# Altium PCB PCB1.PcbDoc (part 1 of 2)
Units mil, origin at the board's own origin, x right, y up, seen from the top; angles counter-clockwise.
Board outline 1411.86 x 1442.8 mil, 4 copper layers (Top Layer, GND, Sign, Bottom Layer), stack 74.06 mil thick; 79 components, 66 nets, 343 pads, 393 vias.
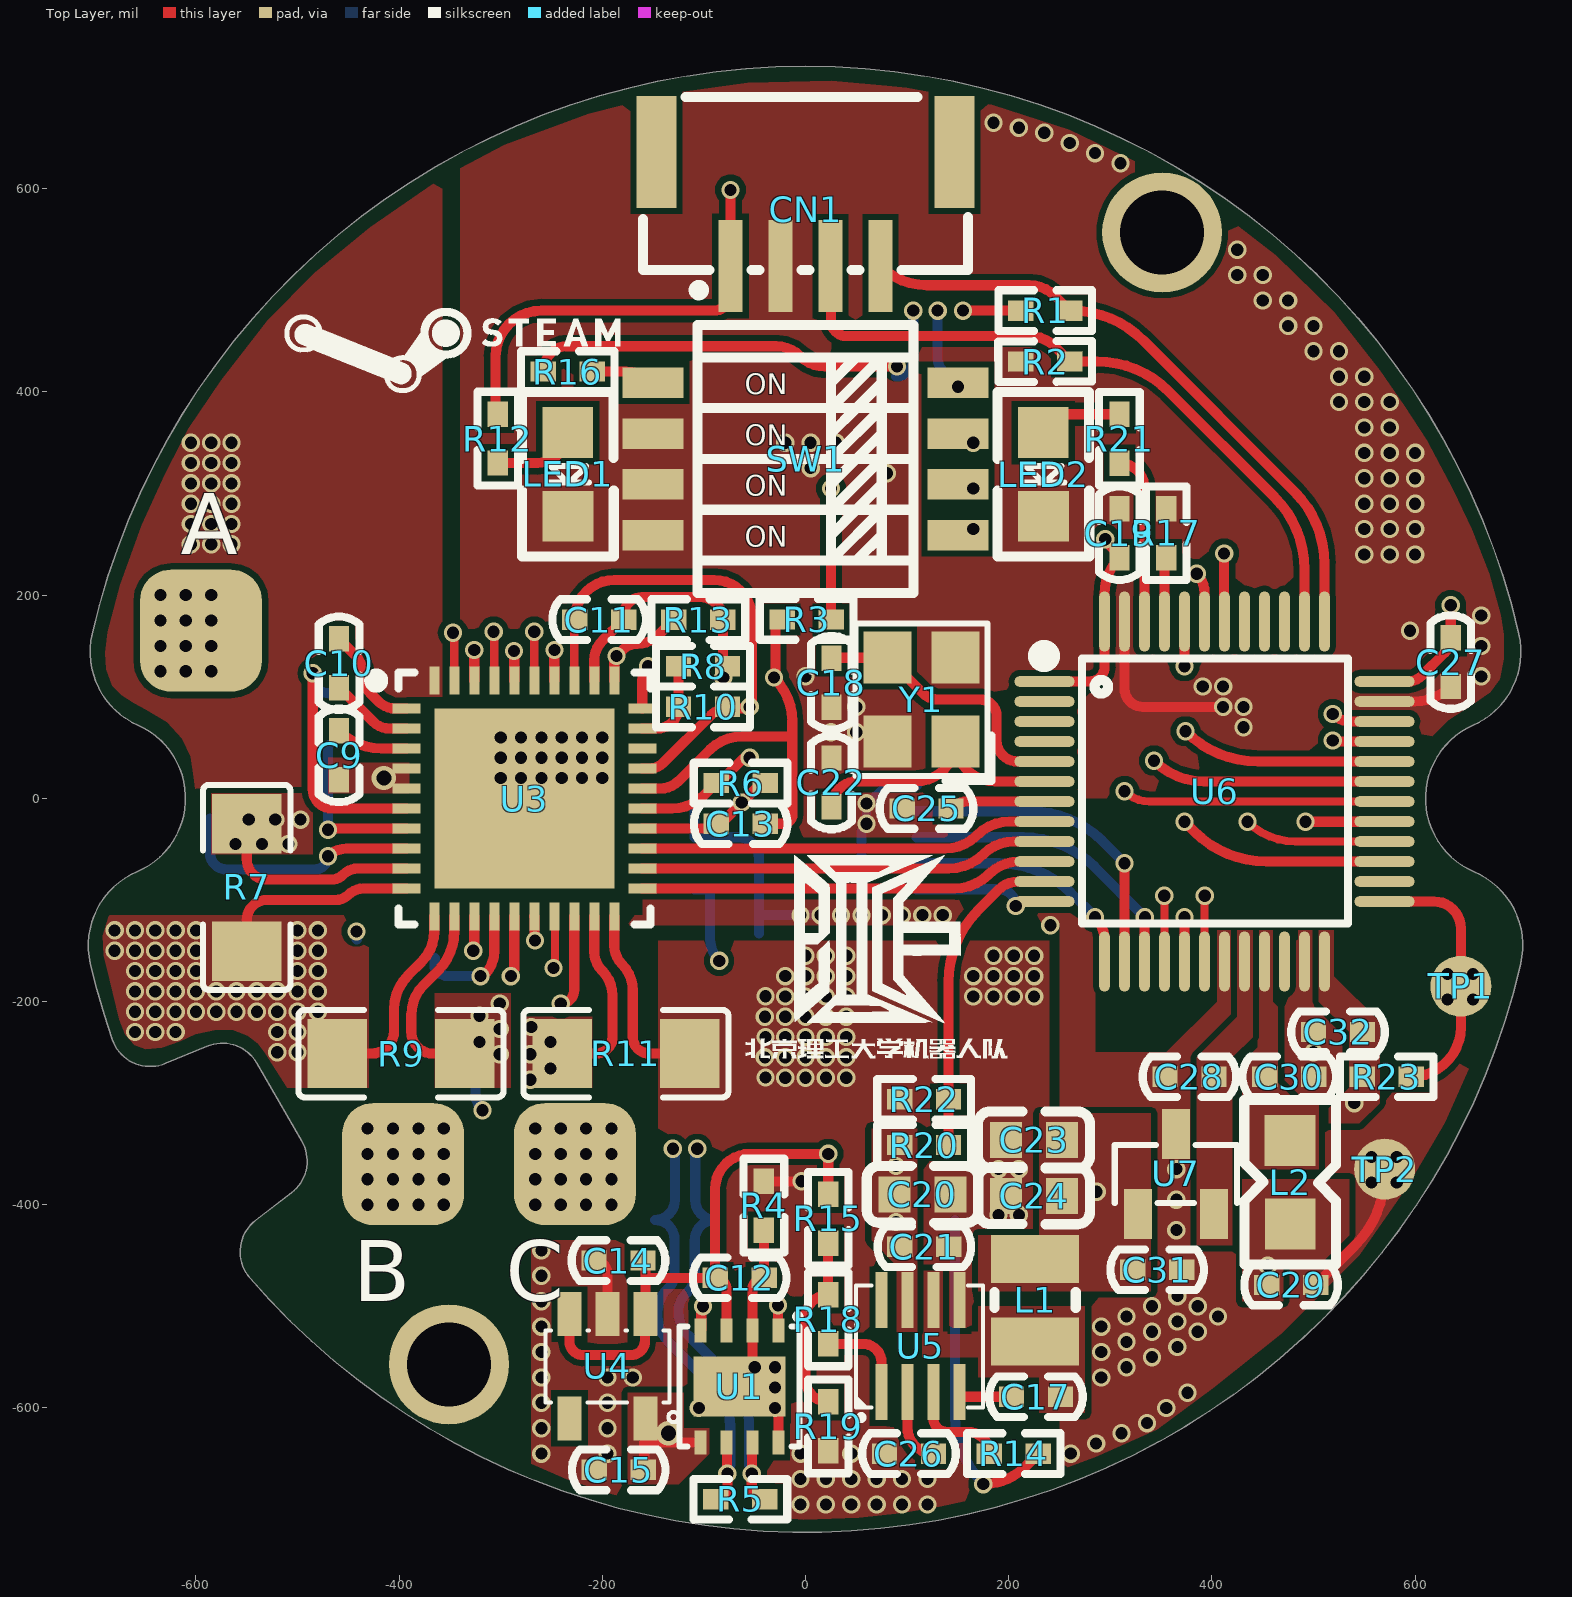
[diagram p0: Top Layer view]
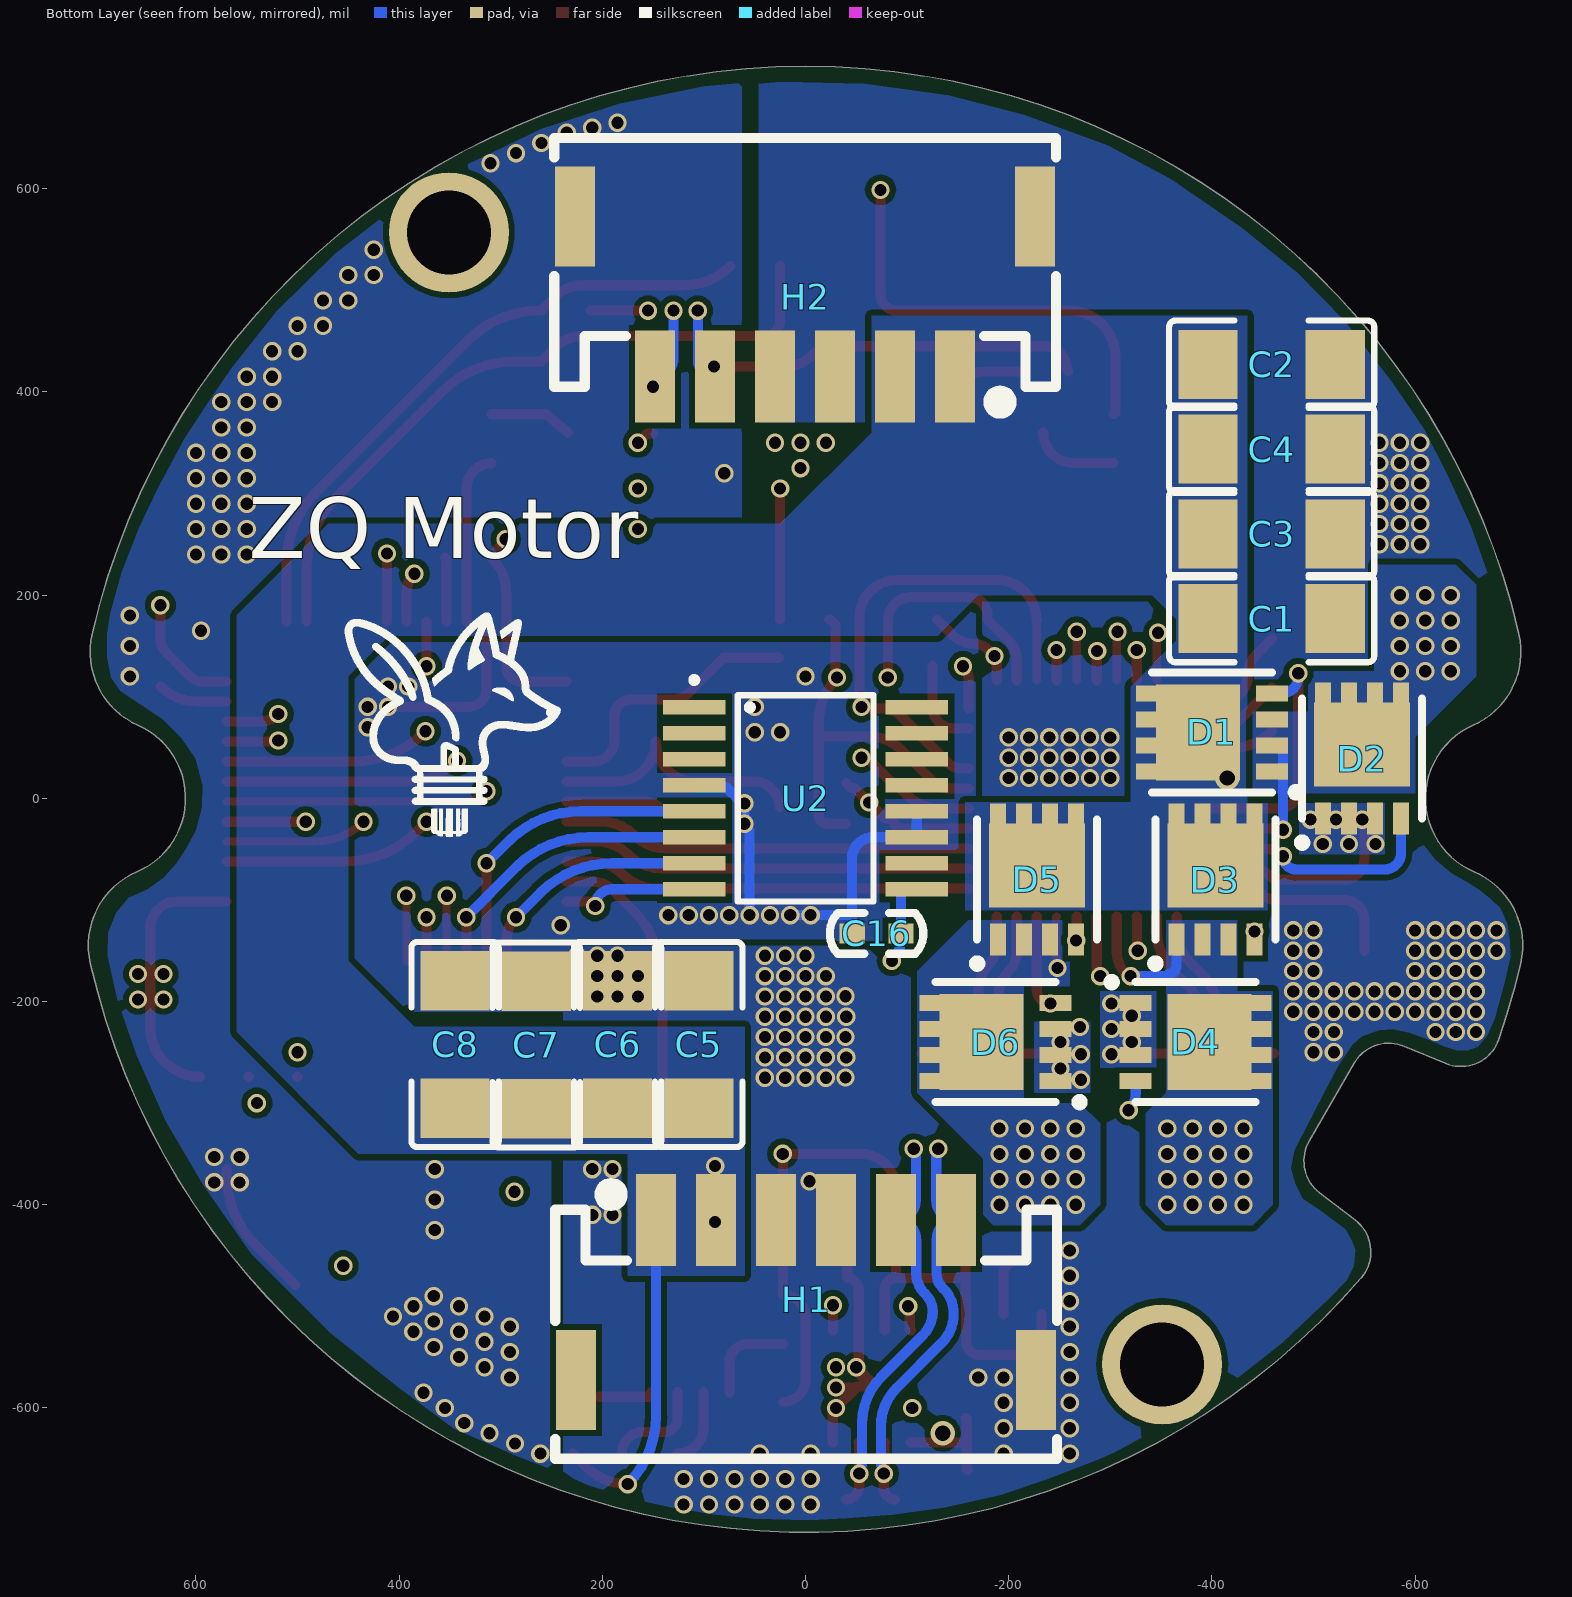
[diagram p1: Bottom Layer view, seen from below]
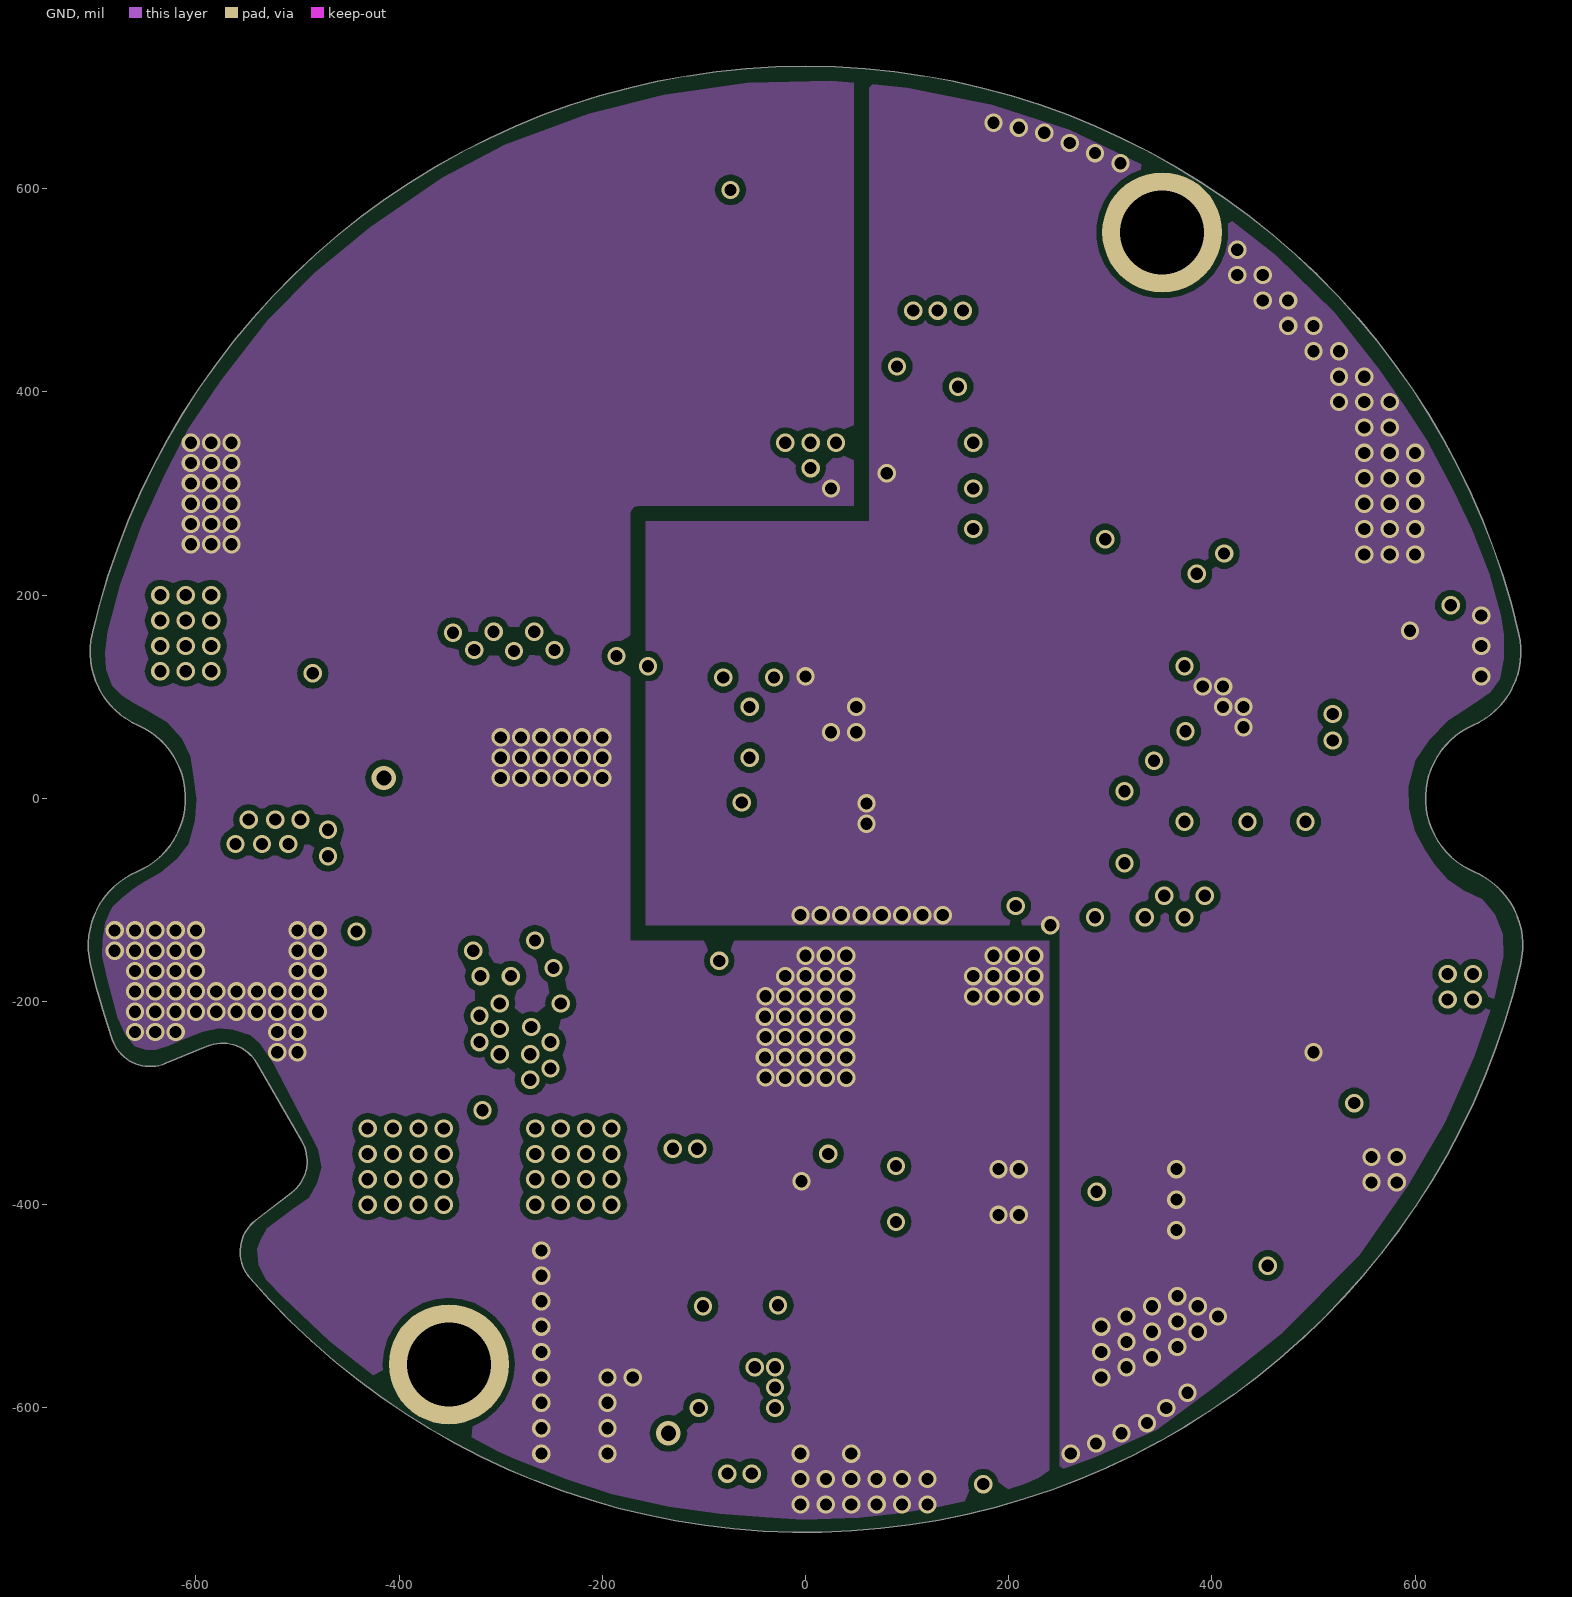
[diagram p2: GND]
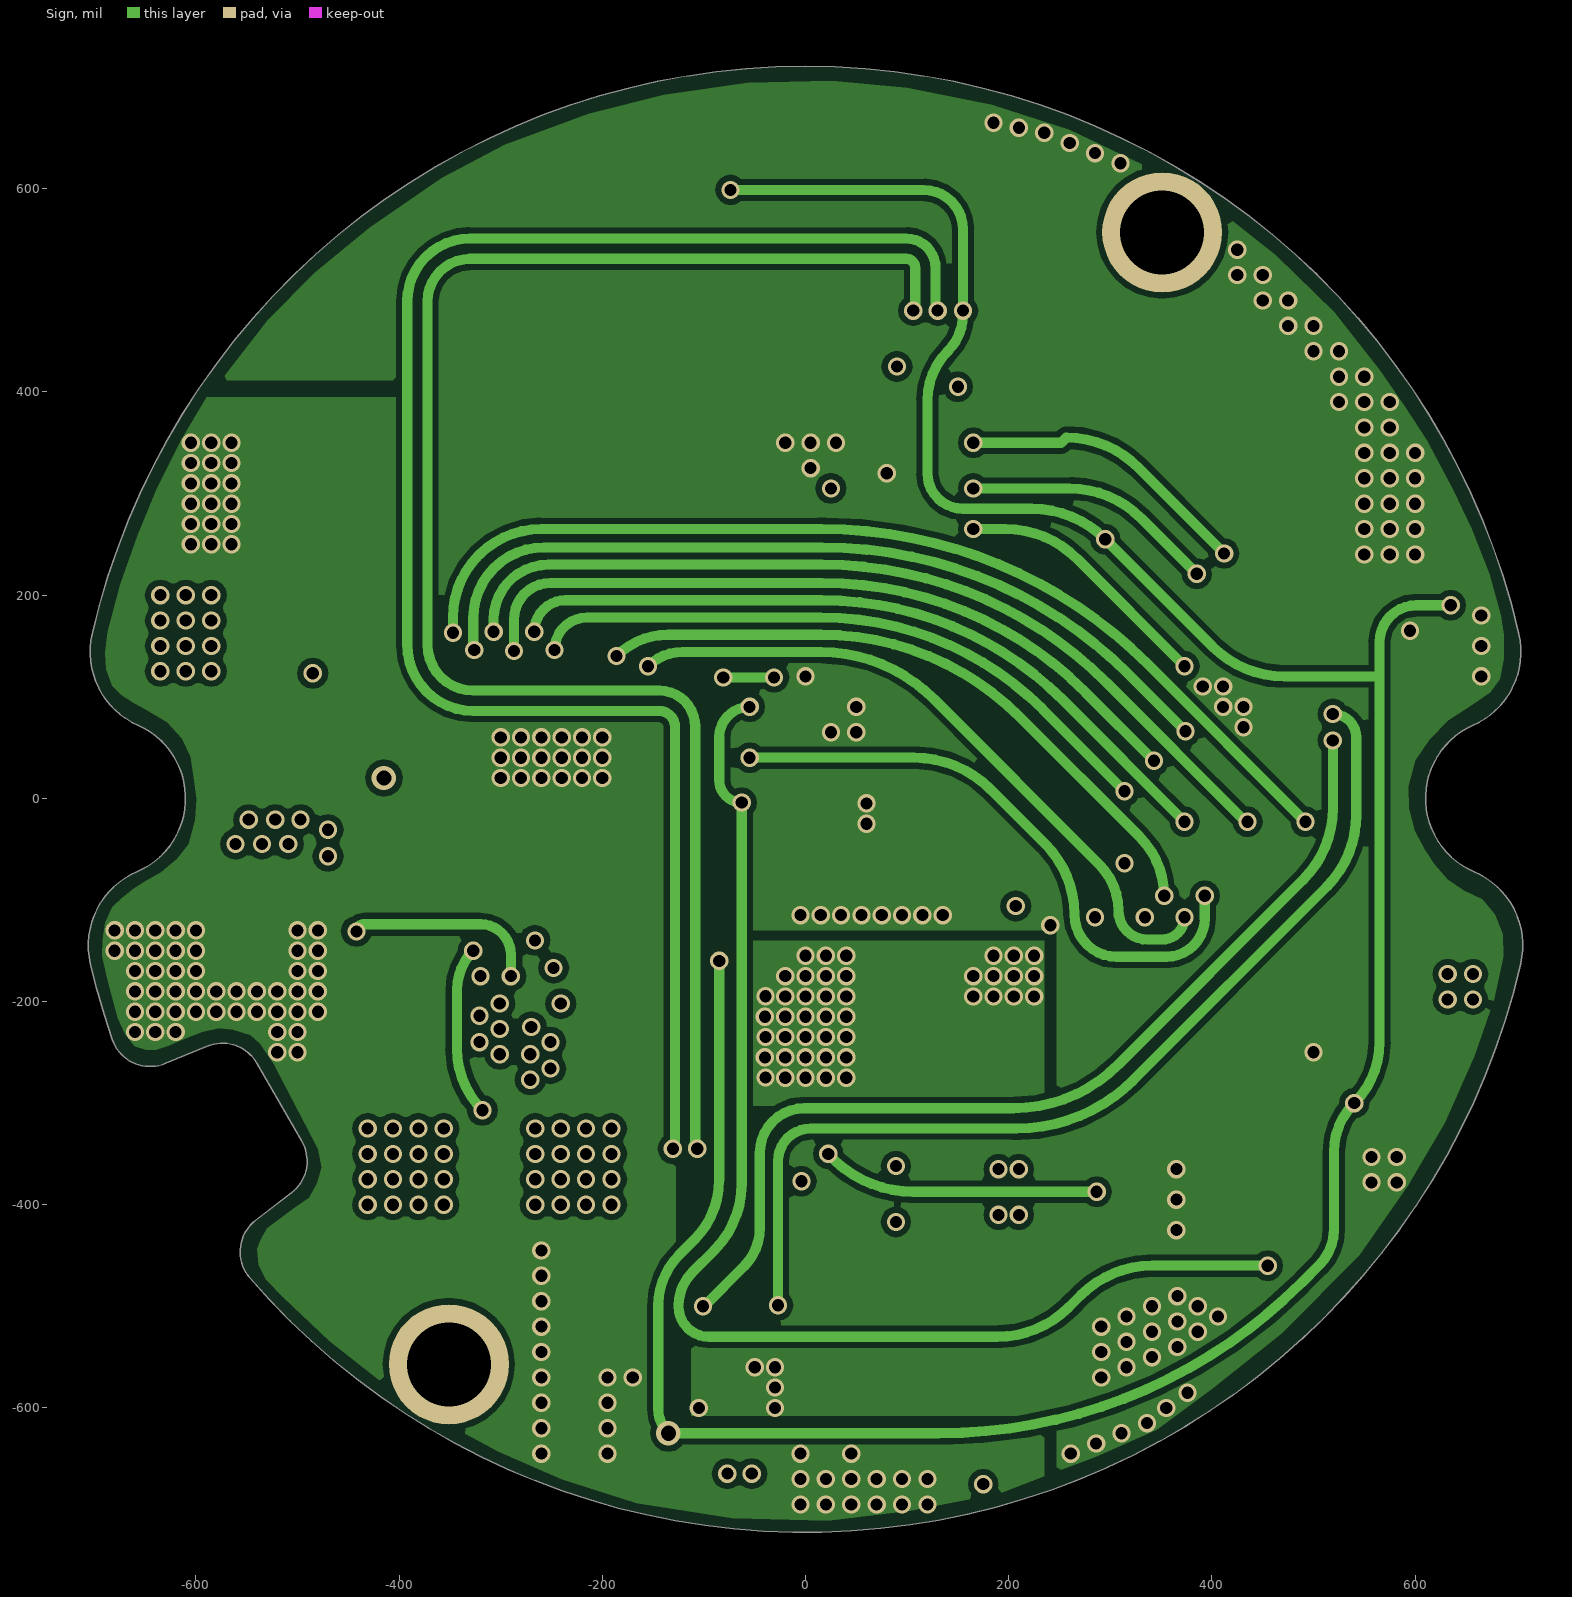
[diagram p3: Sign]
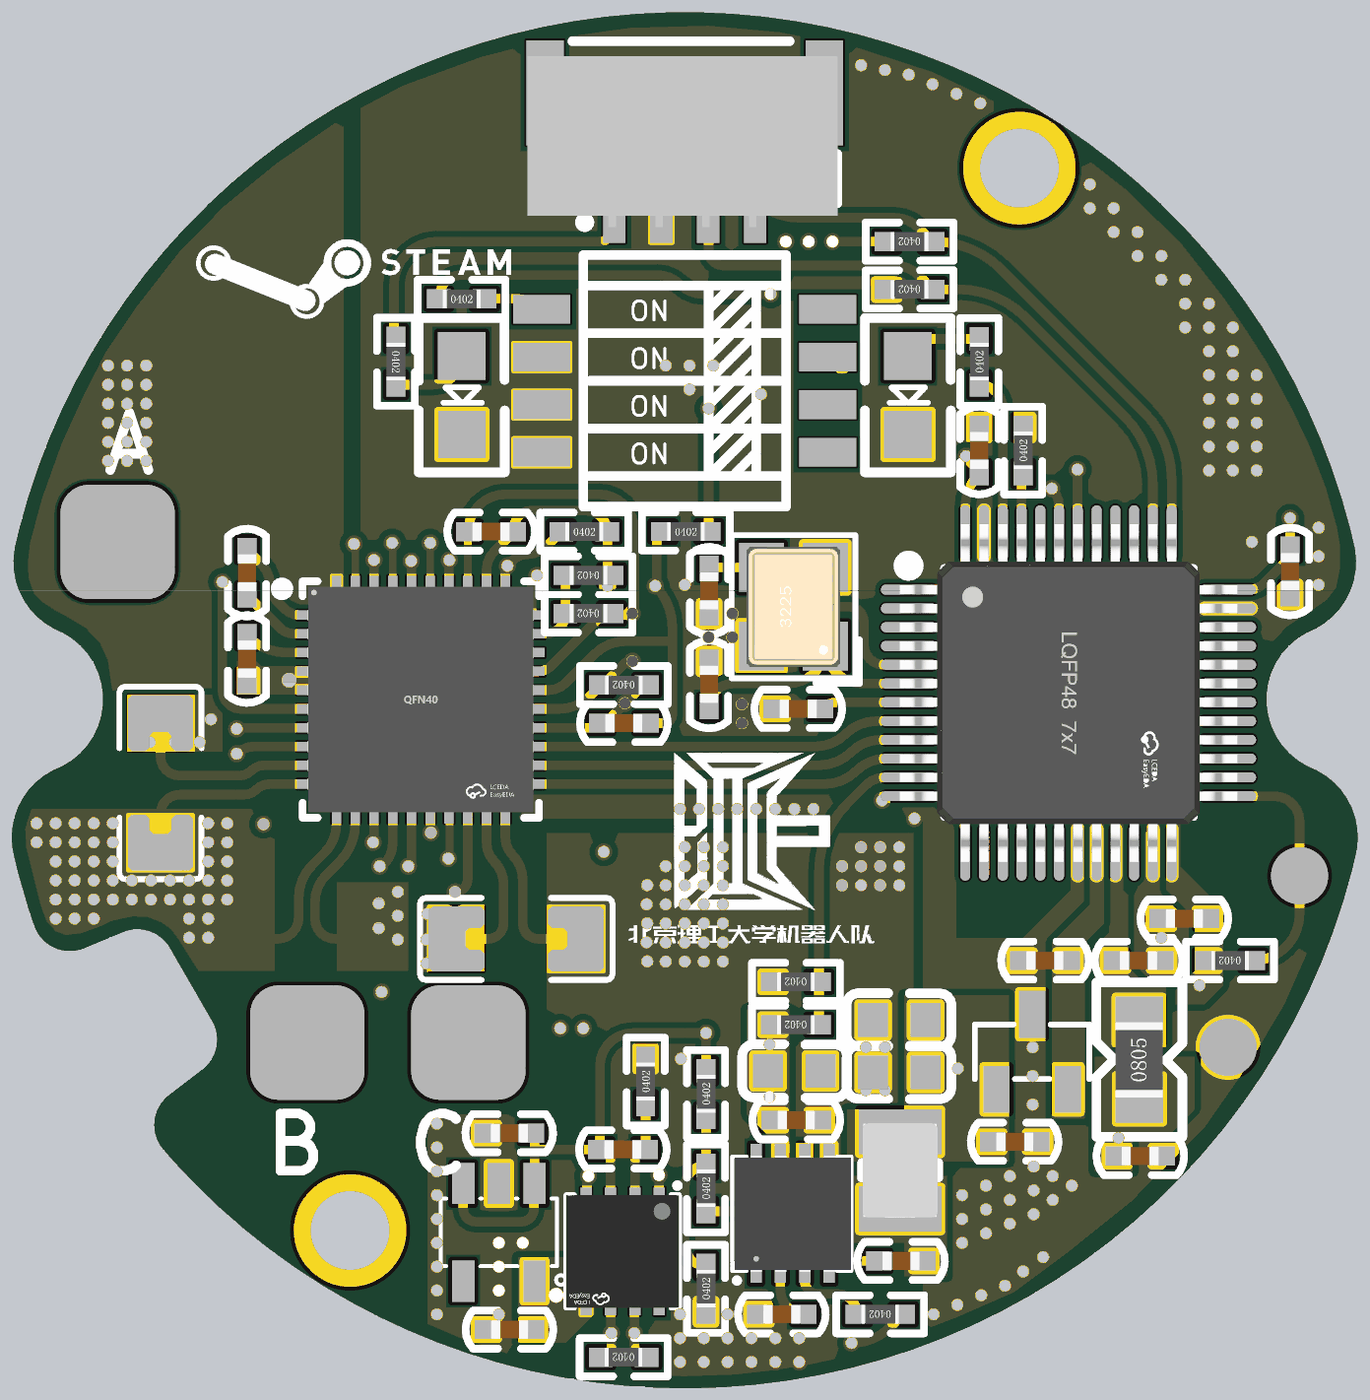
[diagram p5: 3D render of the assembled board from above, using the file's embedded part models]
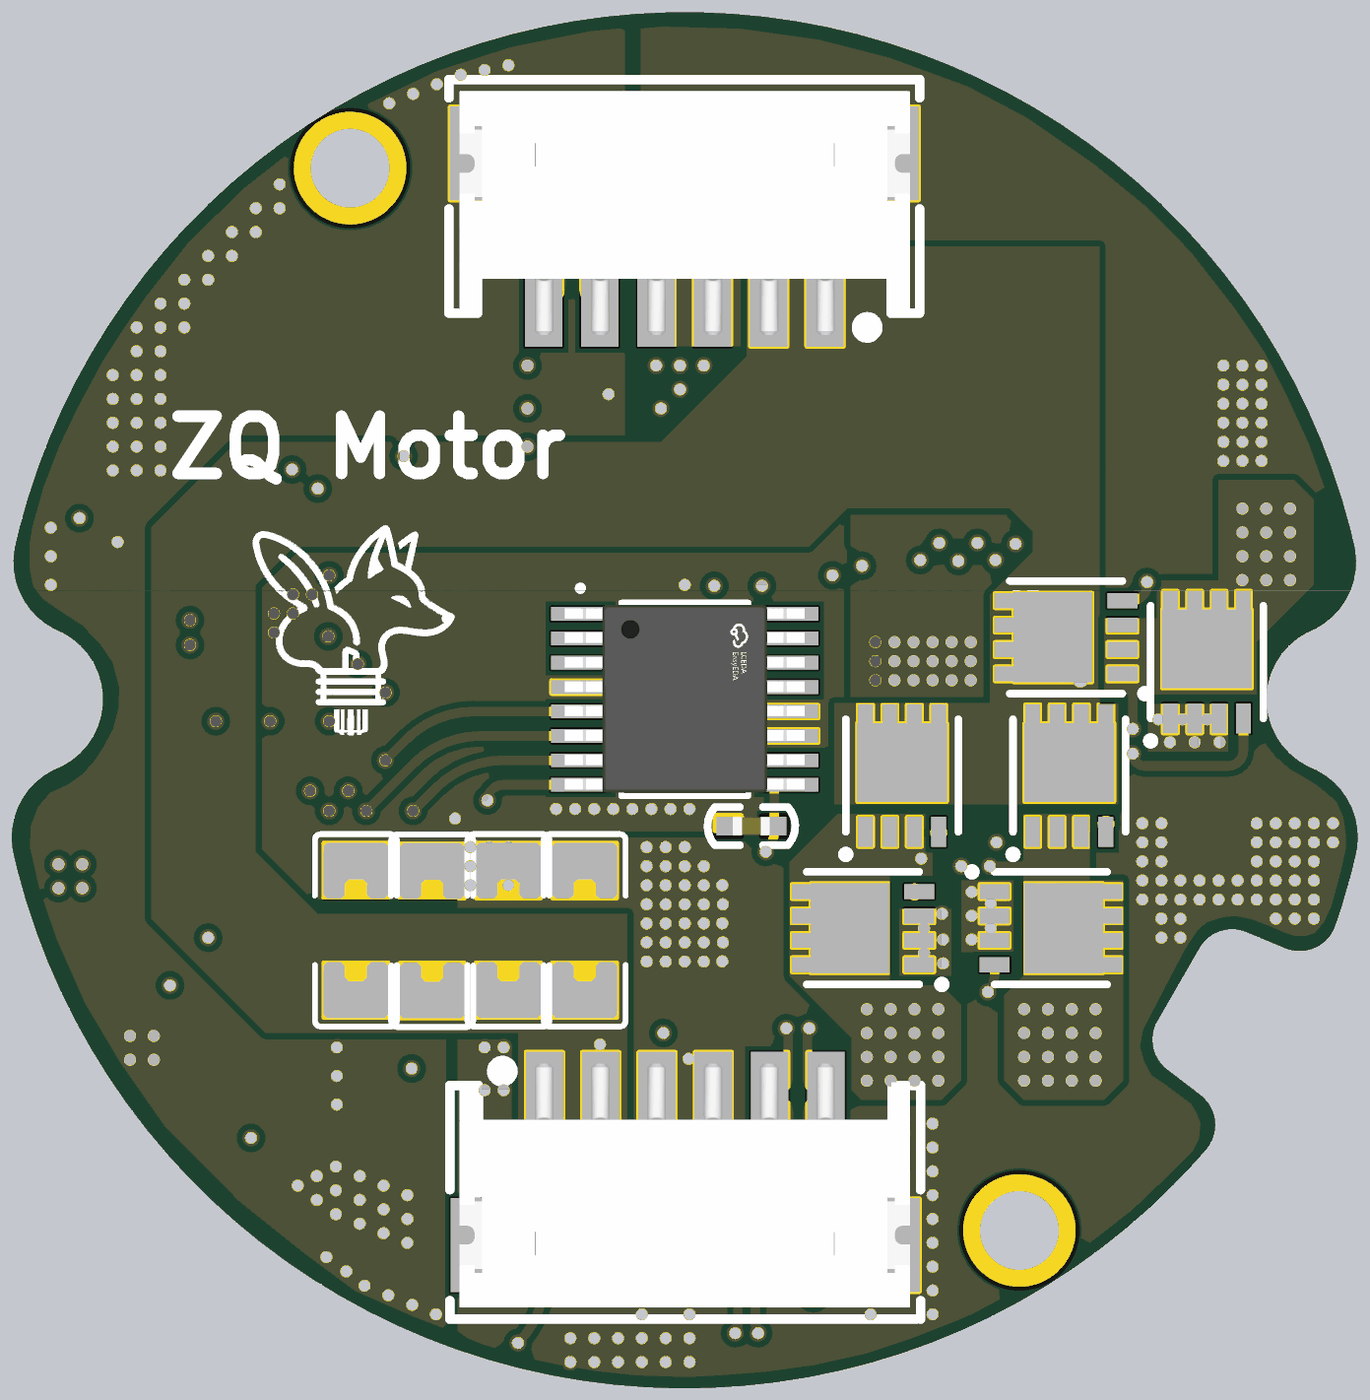
[diagram p6: 3D render of the assembled board from below, using the file's embedded part models]

## Layer stack, top to bottom
Top Solder: solder mask 0.4, Solder Resist, Dk 3.5
Top Layer: signal copper 1.4
Dielectric 2: prepreg 10.6299, PP-006, Dk 4.1
GND: signal copper 1.378
Dielectric 1: dielectric 47.244, FR-4, Dk 4.8
Sign: signal copper 1.378
Dielectric 3: prepreg 10.6299, PP-006, Dk 4.1
Bottom Layer: signal copper 1.4
Bottom Solder: solder mask 0.4, Solder Resist, Dk 3.5

## Board outline
-546.84,-472.1 cw(c-517.04,-446.38) -541.01,-415.14 -505.93,-388.23 ccw(c-529.9,-356.99) -495.81,-337.31 -540.02,-260.73 ccw(c-574.11,-280.41) -589.18,-244.04 -630.03,-260.96 cw(c-645.1,-224.58) -682.28,-237.53 cw(c0,0) -703.91,-162.57 cw(c-627.19,-144.85) -658.08,-72.43 ccw(c-688.98,0) -657.17,72.03 cw(c-625.35,144.06) -702.08,161.73 cw(c0,0) 702.08,161.73 cw(c625.35,144.06) 657.17,72.03 ccw(c688.98,0) 658.08,-72.43 cw(c627.19,-144.85) 703.91,-162.57 cw(c0,0)

## Design rules (kind name [scope] priority, off if disabled: settings)
Clearance [All] p1: gap=6 ignorepadtopadclearanceinfootprint=FALSE except(0: Arc-Hole Track-Hole SMDPad-Hole THPad-Hole Via-Hole Fill-Hole Poly-Hole Region-Hole Text-Hole)
DiffPairsRouting [All] p1: maxlimit=10 minlimit=10 mostfreqgap=10 toplayer_minwidth=8 toplayer_maxwidth=15 toplayer_prefwidth=10 midlayer1_minwidth=8 midlayer1_maxwidth=15 midlayer1_prefwidth=10 midlayer2_minwidth=8 midlayer2_maxwidth=15 midlayer2_prefwidth=10 bottomlayer_minwidth=8 bottomlayer_maxwidth=15 bottomlayer_prefwidth=10 maxuncoupledlength=500
HoleSize [All] p1: absolutevalues=TRUE maxlimit=10000 minlimit=1 maxpercent=80.000 minpercent=20.000
HoleToHoleClearance [All] p1: gap=0 allowstackedmicrovias=TRUE
MinimumSolderMaskSliver [All] p1: minsoldermaskwidth=0
PlaneClearance [All] p1: clearance=6
PlaneConnect [All] p1: planeconnectstyle=Direct reliefexpansion=20 reliefentries=4 reliefconductorwidth=10 reliefairgap=10
PolygonConnect [All] p1: connectstyle=Direct reliefconductorwidth=10 reliefentries=4 polygonreliefangle="90 Angle" airgapwidth=10
RoutingVias [All] p1: holewidth=12 width=18 viastyle="Through Hole" minholewidth=12 minwidth=18 maxholewidth=28 maxwidth=50
SilkToSilkClearance [All] p1: silktosilkclearance=0
SilkToSolderMaskClearance [IsPad] p1: minsilkscreentomaskgap=0 clearancetoexposedcopper=TRUE
SolderMaskExpansion [All] p1: expansion=4 istentingtop=FALSE
Width [All] p1: maxlimit=20 minlimit=8 preferedwidth=10
22 further rules are at their usual default settings.

## Classes and differential pairs
component class Sheet1: C1 C2 C3 C4 C6 C8 C11 C15 C16 C19 C23 C25 C31 CN1 D1 D2 D3 D4 D5 D6 H1 H2 L1 L2 LED1 LED2 R1 R2 R3 R4 R6 R8 R9 R10 R12 R13 R15 R18 R19 R23 SW1 TP1 TP2 U1 U3 U5 U7 Y1

## Components (designator, comment, footprint, x,y, rotation, side; value= is the part's Value field where it differs from the comment)
C1 "100uF" 1206 -1049.75,159.95 r0 bottom
C2 "100uF" 1206 -1049.75,410.11 r0 bottom
C3 "100uF" 1206 -1049.75,243.34 r0 bottom
C4 "100uF" 1206 -1049.75,326.73 r0 bottom
C5 "100uF" 1206 88.02,348.63 r270 bottom
C6 "100uF" 1206 168.02,348.63 r270 bottom
C7 "100uF" 1206 248.02,348.23 r270 bottom
C8 "100uF" 1206 328.02,348.63 r270 bottom
C9 "1uF" c0402 -459.14,66.35 r270 top
C10 "47nF" c0402 -459.14,156.97 r270 top
C11 "1uF" c0402 -179.05,175.88 r180 top
C12 "0.1uF" c0402 -40.8,-472 r180 top
C13 "0.1uF" c0402 -39.8,-25 r180 top
C14 "10uF" c0402 -208.2,-455 r0 top
C15 "10uF" c0402 -208,-661 r0 top
C16 "100nF" C0402 -94,-133 r0 bottom
C17 "100nF" c0402 202.73,-588.97 r0 top
C18 "15pF" c0402 25.54,137.9 r270 top
C19 "0.1uF" c0402 309,236.8 r90 top
C20 "10uF" C0603 730.24,-301.82 r180 top
C21 "100nF" c0402 141.13,-441.45 r180 top
C22 "15pF" c0402 25.54,-8.5 r90 top
C23 "10uF" C0603 -390.24,-424.25 r0 top
C24 "10uF" C0603 -390.24,-479.25 r0 top
C25 "0.1uF" c0402 143.2,-10 r180 top
C26 "100nF" c0402 77.73,-644.97 r0 top
C27 "0.1uF" c0402 635,158.2 r270 top
C28 "0.1uF" c0402 402,-274 r180 top
C29 "0.1uF" c0402 502,-479 r180 top
C30 "0.1uF" c0402 500.2,-274 r180 top
C31 "0.1uF" c0402 322,-464 r0 top
C32 "0.1uF" c0402 500,-230 r0 top
CN1 "卧式STLINK" CONN-SMD_4P-P1.25_GH1.25-4P 0,580 r180 top locked
D1 "NTMFS5C410NL" DFN-8_L3.0-W3.0-P0.65-BL -400,65 r90 bottom
D2 "NTMFS5C410NL" DFN-8_L3.0-W3.0-P0.65-BL -547.79,39.06 r180 bottom
D3 "NTMFS5C410NL" DFN-8_L3.0-W3.0-P0.65-BL -403.39,-80 r180 bottom
D4 "NTMFS5C410NL" DFN-8_L3.0-W3.0-P0.65-BL -384,-240 r270 bottom
D5 "NTMFS5C410NL" DFN-8_L3.0-W3.0-P0.65-BL -228,-80 r180 bottom
D6 "NTMFS5C410NL" DFN-8_L3.0-W3.0-P0.65-BL -187,-240 r90 bottom
H1 "卧式XH1.5 6PIN" CONN-SMD_6P-P1.50_ZX-ZH1.5-6PWT 0,-510 r180 bottom locked
H2 "卧式XH1.5 6PIN" CONN-SMD_6P-P1.50_ZX-ZH1.5-6PWT 0,510 r0 bottom locked
L1 "22uH" IND-SMD_L2.5-W2.0 225.93,-493.97 r270 top value=10uH
L2 "10μH" L0805 477,-419 r90 top
LED1 "LED" led0805 -234,360 r270 top
LED2 "LED" led0805 234,360 r270 top
R1 "10KΩ" R0402 260,480 r180 top
R2 "10KΩ" R0402 260,430 r180.21 top
R3 "0Ω" R0402 -23,176 r0 top
R4 "0Ω" R0402 -41,-425 r90 top
R5 "120Ω" R0402 -40,-690 r180 top
R6 "10KΩ" R0402 -39.8,15 r180 top
R7 "10mR" 1206 -566.98,-678.63 r90 top
R8 "47KΩ" R0402 -76.8,130 r180 top
R9 "10mR" 1206 -989.09,-234.31 r0 top
R10 "0Ω" R0402 -76.8,90 r180 top
R11 "10mR" 1206 414.17,-268.28 r180 top
R12 "2KΩ" R0402 -303,378.2 r270 top
R13 "200KΩ" R0402 -129.55,175.88 r0 top
R14 "10KΩ" R0402 229.13,-644.97 r180 top
R15 "43KΩ" R0402 22.26,-437.97 r90 top
R16 "120Ω" R0402 -258.2,420 r0 top
R17 "10KΩ" R0402 355,236.8 r90 top
R18 "51KΩ" R0402 22.26,-536.97 r90 top
R19 "8.2KΩ" R0402 22.26,-642.26 r90 top
R20 "10KΩ" R0402 140.74,-341.3 r180 top
R21 "2KΩ" R0402 309,329.8 r90 top
R22 "1KΩ" R0402 140.74,-296.3 r180 top
R23 "2KΩ" R0402 596.2,-274 r180 top
SW1 "DSHP04TSGER" SW-SMD_8P-L6.7-W5.4-P1.27-LS8.4 0,334 r90 top locked
TP1 "testpoint" testpoint 645,-185 r270 top
TP2 "testpoint" testpoint 570,-365 r0 top
U1 "SIT1057QTK/3" DFN-8_L3.0-W3.0-P0.65-BL-EP -65.1,-578.97 r180 top
U2 "MT6825GT-STD" TSSOP-16_L5.0-W4.4-P0.65-LS6.4-BL-1 0,0 r270 bottom locked
U3 "DRV8323HRTAR" QFN-40_L6.0-W6.0-P0.50-BL-EP4.5 -276.83,-0.24 r270 top
U4 "XC6201P332MR-HXY" SOT-23-5_L3.0-W1.7-P0.95-LS2.8-BR -195,-559 r90 top
U5 "MP9943" "QFN-8 3x3" 74.75,-584.52 r90 top
U6 "STM32G474CET6_1" LQFP-48_L7.0-W7.0-P0.50-LS9.0-BL 402.54,6.7 r270 top
U7 "REF3133AIDBZR" SOT-23-3_L2.9-W1.3-P1.90-LS2.4-BR 519.31,-150.65 r270 top
Y1 "3225贴片晶振" OSC-3225-4P 114,97.04 r90 top value=16M

## Footprints (in the part's own frame and the unit in brackets; to place one, negate y for a bottom-side part, rotate by r counter-clockwise, add the part's x,y. Pads: shape width x height; smd on the part's side, far side on the other; paste and mask are expansions set on the pad)
1206 [mm]
  rect 1.485x1.728 smd paste-100 mask+0.051: 1(13.417,-0.431) 2(16.602,-0.431)
  silkscreen extent 12.45,-1.52 17.57,0.66, body extent 13.41,-1.24 16.61,0.38, height 1.11
c0402 [mil]
  rect 25x20 smd: 1(0,0) 2(48.2,0)
  silkscreen extent -22,-20 70,20, body extent 5,-10 44,10, height 20
C0402 [mil]
  rect 25x20 smd: 1(0,0) 2(48.2,0)
  silkscreen extent -22,-20 70,20, body extent 5,-10 44,10, height 20
C0603 [mm]
  rect 0.8x0.9 smd: 1(14.93,2.234) 2(16.33,2.234)
  silkscreen extent 14.22,1.52 17.02,2.95, body extent 14.82,1.84 16.42,2.64, height 0.78
CONN-SMD_4P-P1.25_GH1.25-4P [mm]
  rect 0.6x2.3 smd mask+0.051: 1(1.875,1.425) 2(0.625,1.425) 3(-0.625,1.425) 4(-1.875,1.425)
  rect 1x2.8 smd mask+0.051: 5(-3.725,-1.425) 6(3.725,-1.425)
  silkscreen extent -4.06,-2.8 4.06,2.16, body extent -4.07,-2.4 4.19,2.15, height 4.13
CONN-SMD_6P-P1.50_ZX-ZH1.5-6PWT [mm]
  rect 1x2.3 smd paste+0 mask+0.05: 1(-3.738,2.413) 2(-2.238,2.413) 3(-0.738,2.413) 4(0.762,2.413) 5(2.262,2.413) 6(3.762,2.413)
  rect 1x2.5 smd paste+0 mask+0.05: 7(5.762,-1.587) 8(-5.738,-1.587)
  silkscreen extent -6.26,-3.56 6.28,3.46, body extent -6,-3.25 6.01,3.25, height 3.78
DFN-8_L3.0-W3.0-P0.65-BL [mm]
  rect 0.4x0.8 smd paste-100 mask+0.051: D(-0.975,1.5) D(-0.325,1.5) D(0.325,1.5) D(0.975,1.5) G(0.975,-1.5) S(-0.975,-1.5) S(-0.325,-1.5) S(0.325,-1.5)
  rect 2.4x2.1 smd paste-100 mask+0.051: D(0,0.35)
  silkscreen extent -1.6,-2.2 1.5,1.5, body extent -1.55,-1.6 1.55,1.6, height 0.8
DFN-8_L3.0-W3.0-P0.65-BL-EP [mm]
  rect 0.3x0.6 smd paste+0 mask+0.05: 1(-0.975,-1.4) 2(-0.325,-1.4) 3(0.325,-1.4) 4(0.975,-1.4) 5(0.975,1.4) 6(0.325,1.4) 7(-0.325,1.4) 8(-0.975,1.4)
  rect 2.3x1.5 smd paste+0 mask+0.05: 9(0,0)
  silkscreen extent -1.51,-1.8 1.5,1.5, body extent -1.5,-1.5 1.5,1.5, height 1.01
IND-SMD_L2.5-W2.0 [mm]
  rect 1.2x2.2 smd: 1(1.028,0) 2(-1.028,0)
  silkscreen extent -0.2,-1.02 0.2,1.02, body extent -1.26,-1 1.26,1, height 1.2
L0805 [mil]
  rect 50x50 smd: 1(0,0) 2(82.3,0.2)
  silkscreen extent -40,-45 122,45, body extent 1,-24 80,25, height 22
led0805 [mil] "1/8W"
  rect 50x50 smd: 1(0,0) 2(82.3,0.2)
  silkscreen extent -40,-45 122,45, body extent 2,-25 80,25, height 20
LQFP-48_L7.0-W7.0-P0.50-LS9.0-BL [mm]
  oval 0.27x1.5 smd paste+0 mask+0.05: 1(-2.75,-4.25) 2(-2.25,-4.25) 3(-1.75,-4.25) 4(-1.25,-4.25) 5(-0.75,-4.25) 6(-0.25,-4.25) 7(0.25,-4.25) 8(0.75,-4.25) 9(1.25,-4.25) 10(1.75,-4.25) 11(2.25,-4.25) 12(2.75,-4.25) 25(2.75,4.25) 26(2.25,4.25) 27(1.75,4.25) 28(1.25,4.25) 29(0.75,4.25) 30(0.25,4.25) 31(-0.25,4.25) 32(-0.75,4.25) 33(-1.25,4.25) 34(-1.75,4.25) 35(-2.25,4.25) 36(-2.75,4.25)
  oval 1.5x0.27 smd paste+0 mask+0.05: 13(4.25,-2.75) 14(4.25,-2.25) 15(4.25,-1.75) 16(4.25,-1.25) 17(4.25,-0.75) 18(4.25,-0.25) 19(4.25,0.25) 20(4.25,0.75) 21(4.25,1.25) 22(4.25,1.75) 23(4.25,2.25) 24(4.25,2.75) 37(-4.25,2.75) 38(-4.25,2.25) 39(-4.25,1.75) 40(-4.25,1.25) 41(-4.25,0.75) 42(-4.25,0.25) 43(-4.25,-0.25) 44(-4.25,-0.75) 45(-4.25,-1.25) 46(-4.25,-1.75) 47(-4.25,-2.25) 48(-4.25,-2.75)
  silkscreen extent -3.59,-4.46 3.3,3.34, body extent -4.5,-4.5 4.5,4.5, height 1.45
OSC-3225-4P [mm] "3.2*2.5*0.7mm(长宽高)                             淘宝ID:黄晶宝石"
  rect 1.3x1.2 smd: 1(-1.05,-0.85) 2(1.05,-0.85) 3(1.05,0.85) 4(-1.05,0.85)
  silkscreen extent -2.03,-1.75 1.91,1.65, body extent -1.6,-1.25 1.6,1.25, height 0.7
"QFN-8 3x3" [mm]
  rect 1.4x0.3 smd: 1(0,0) 2(0,-0.65) 3(0,-1.3) 4(0,-1.95) 5(2.3,-1.95) 6(2.3,-1.3) 7(2.3,-0.65) 8(2.3,0)
  silkscreen extent -0.64,-2.54 2.67,0.64, body extent -0.41,-2.53 2.69,0.57, height 0.94
QFN-40_L6.0-W6.0-P0.50-BL-EP4.5 [mm]
  rect 0.25x0.7 smd paste-100 mask+0.051: 1(-2.25,-2.95) 2(-1.75,-2.95) 3(-1.25,-2.95) 4(-0.75,-2.95) 5(-0.25,-2.95) 6(0.25,-2.95) 7(0.75,-2.95) 8(1.25,-2.95) 9(1.75,-2.95) 10(2.25,-2.95) 21(2.25,2.95) 22(1.75,2.95) 23(1.25,2.95) 24(0.75,2.95) 25(0.25,2.95) 26(-0.25,2.95) 27(-0.75,2.95) 28(-1.25,2.95) 29(-1.75,2.95) 30(-2.25,2.95)
  rect 0.7x0.25 smd paste-100 mask+0.051: 11(2.95,-2.25) 12(2.95,-1.75) 13(2.95,-1.25) 14(2.95,-0.75) 15(2.95,-0.25) 16(2.95,0.25) 17(2.95,0.75) 18(2.95,1.25) 19(2.95,1.75) 20(2.95,2.25) 31(-2.95,2.25) 32(-2.95,1.75) 33(-2.95,1.25) 34(-2.95,0.75) 35(-2.95,0.25) 36(-2.95,-0.25) 37(-2.95,-0.75) 38(-2.95,-1.25) 39(-2.95,-1.75) 40(-2.95,-2.25)
  rect 4.5x4.5 smd paste-100 mask+0.051: 41(0,0)
  silkscreen extent -3.15,-3.85 3.15,3.15, body extent -3.01,-3.01 3.01,3.01, height 0.83
R0402 [mil] "1/16W"
  rect 25x20 smd: 1(0,0) 2(48.2,0)
  silkscreen extent -22,-20 70,20, body extent 5,-10 44,10, height 14
SOT-23-3_L2.9-W1.3-P1.90-LS2.4-BR [mm]
  rect 1.25x0.7 smd: 1(6.562,-4.885) 2(6.562,-2.985) 3(4.562,-3.935)
  silkscreen extent 4.84,-5.46 6.29,-2.41, body extent 4.19,-5.39 6.99,-2.49, height 1.3
SOT-23-5_L3.0-W1.7-P0.95-LS2.8-BR [mm]
  rect 1.1x0.6 smd: 1(1.3,-0.95) 2(1.3,0) 3(1.3,0.95) 4(-1.3,0.95) 5(-1.3,-0.95)
  silkscreen extent -1.4,-1.78 0.9,1.55, body extent -1.5,-1.5 1.5,1.5, height 1.3
SW-SMD_8P-L6.7-W5.4-P1.27-LS8.4 [mil]
  rect 30x60 smd paste+0 mask+2: 1(-75,-150) 2(-25,-150) 3(25,-150) 4(75,-150) 5(75,150) 6(25,150) 7(-25,150) 8(-75,150)
  silkscreen extent -132,-106 132,106
testpoint [mil]
  round 60 smd: 1(0,0)
TSSOP-16_L5.0-W4.4-P0.65-LS6.4-BL-1 [mm]
  rect 0.364x1.56 smd paste+0 mask+0.051: 1(-2.275,-2.78) 2(-1.625,-2.78) 3(-0.975,-2.78) 4(-0.325,-2.78) 5(0.325,-2.78) 6(0.975,-2.78) 7(1.625,-2.78) 8(2.275,-2.78) 9(2.275,2.78) 10(1.625,2.78) 11(0.975,2.78) 12(0.325,2.78) 13(-0.325,2.78) 14(-0.975,2.78) 15(-1.625,2.78) 16(-2.275,2.78)
  silkscreen extent -3.03,-2.85 2.58,1.7, body extent -2.51,-3.2 2.49,3.2, height 1.09

## Part data
C1 C2 C3 C4 C5 C6 C7 C8 C20 C23 C24: library part 1210贴片电容, "1210贴片电容"
C9 C10 C11 C12 C13 C14 C15 C16 C17 C18 C19 C21 C22 C25 C26 C27 C28 C29 C30 C31 C32: library part 0402贴片电容, "贴片电容0402"
D1 D2 D3 D4 D5 D6: "N沟道MOS管", ComponentLink1Description="Manufacturer Link", ComponentLink1URL=http://www.irf.com/, DatasheetVersion=PD-9.814, LatestRevisionDate=17-Jul-2002, LatestRevisionNote="Re-released for DXP Platform.", Note="Pin 2 is electrically connected to pin 4.", PackageDescription="TO, Thru-Hole, Vertical, Heatsink Mounted; 3 In-Line Leads; Pitch 2.54 mm", PackageReference=TO-220AB, PackageVersion=Feb-1997, Published=8-Jun-2000, Publisher="Altium Limited"
L1: library part 0530屏蔽电感, "一体成型屏蔽电感，0530封装，额定电流3A", DC Resistance (DCR)=125mΩ, JLCPCB Part Class="Extended Part", LCSC Part Name="10uH ±20% 3.5A", Manufacturer=XR(祥如), Manufacturer Part=XR0530-100M, Rated Current=3.2A, Saturation Current (Isat)=3.5A, Tolerance=±20%, Add into BOM=yes, Convert to PCB=yes, Datasheet=https://atta.szlcsc.com/upload/public/pdf/source/20240328/42FE63A3232C4AF7EB8F1CDEDD5FC69F.pdf, Device=XR0530-100M, Supplier=LCSC, Supplier Footprint=SMD,0530, Supplier Part=C5307602, Symbol=XR0530-100M, Type=一体成型电感
L2: library part 0805贴片电感, "0805贴片电感"
LED1 LED2: library part 0805贴片LED, "0805贴片LED"
R1 R2 R3 R4 R5 R6 R8 R10 R12 R13 R14 R15 R16 R17 R18 R19 R20 R21 R22 R23: library part 0402贴片电阻, "0402贴片电阻"
R7 R9 R11: library part 2512检流电阻, "2512检流电阻"
U2: "18位绝对角编码器"
U3: JLCPCB Part Class="Extended Part", LCSC Part Name="5mA 无刷直流BLDC电机驱动芯片 60V", Manufacturer=TI(德州仪器), Add into BOM=yes, Convert to PCB=yes, Datasheet=https://www.ti.com/cn/lit/gpn/drv8323, Device=DRV8323HRTAR, Manufacturer Part=DRV8323HRTAR, Supplier=LCSC, Supplier Footprint=QFN-40-EP(6x6), Supplier Part=C701783, Symbol=DRV8323HRTAR
U4: "3.3V LDO", JLCPCB Part Class="Extended Part", Manufacturer="HXY MOSFET(华轩阳电子)", MAX Output Current=300mA, Maximum Input Voltage=12V, Output Voltage=3.3V, Add into BOM=yes, Convert to PCB=yes, Datasheet=https://atta.szlcsc.com/upload/public/pdf/source/20231208/3D7EFECB06481ED5AED4680614D7FFF5.pdf, Device=XC6201P332MR-HXY, LCSC Part Name=XC6201P332MR-HXY, Manufacturer Part=XC6201P332MR-HXY, Output Polarity=正极, Output Type=固定, Supplier=LCSC, Supplier Footprint=SOT-23-5L, Supplier Part=C19626990, Symbol=XC6201P332MR-HXY

## Free pads (board coordinates)
  round 118.11 hole 82.68: 4(-351.07,-557.07) 6(351.07,557.07)
  rrect50% 120x120 smd: 14(-595,165) 14(-396,-360) 14(-227,-360)

## Via types
v1: diameter 18, hole 12, Top Layer to Bottom Layer, tented both sides, 391 vias
v2: diameter 24, hole 15, Top Layer to Bottom Layer, tented both sides, 2 vias

## Nets (pads, with @x,y where several pads share a name; then routed paths per layer and width w, separated by ;. In a path a pad name is that pad's centre, name@x,y a point inside that pad or via, vN(x,y) a via of type N, cw(c..) or ccw(c..) an arc to the next point about the centre after c; other vN are vias at no path point)
3V3: C15.2 C16.1 C19.1 C27.1 C32.2 CN1.1 R1.2 R12.1 R23.2 U1.5 U2.9 U4.5 U6.1 U6.24 U6.36 U6.48 | length 3916
  Top Layer w10: R12.1@-303,378.2 cw(c-303,380.2) -305,380.2 -305,435 cw(c-260,435) -260,480 -90,480 ccw(c-90,496.18) -73.82,496.18 CN1.1@-73.82,523.9 v1(-73.82,598.82) ; C15.2@-159.8,-661 -158.7,-659.9 -158.7,-634 -158.61,-634.09 ; U4.5@-157.6,-610.18 -158.61,-611.19 -158.61,-634.09 ; U1.5@-103.48,-634.09 -158.61,-634.09 ; v1@153.47,478.47 v1(155,480) R1.2@211.8,480 ; U6.1@235.22,114.97 279.97,114.97 ccw(c279.97,129.27) 294.27,129.27 U6.48@294.27,174.02 294.27,201.11 cw(c344.56,201.24) 304,230.97 C19.1@309,236.8 309,239.3 295,253.3 v1(295,255) ; R23.2@548,-274 R23.2@548.2,-273.8 ; U6.36@569.86,114.97 592.45,114.97 ccw(c592.45,135.55) 607,121 ; 607,121 628.49,142.49 ccw(c612.79,158.2) C27.1@635,158.2 v1(635,190)
  Sign w10: v2(-135,-625) cw(c-110.86,-600.86) -141.75,-615.39 cw(c-110.86,-600.86) -145,-600.86 -145,-500 cw(c-72.57,-500) -123.79,-448.79 -110,-435 ; v2@-133,-625 130.94,-625 ccw(c131.01,-120.44) 487.82,-477.18 505.86,-459.14 ccw(c471.72,-425) 520,-425 520,-348.28 cw(c588.28,-348.28) v1(540,-300) ccw(c479.64,-239.64) 540.04,-299.96 ccw(c479.64,-239.64) 565,-239.64 565,84.16 ; -109.29,-434.29 ccw(c-167.93,-375.65) -85,-375.65 v1(-85,-160) ; v1(-73.82,598.82) 116.18,598.82 cw(c116.18,560) 155,560 v1(155,480) 155,476.21 cw(c103.79,476.21) 140,440 ccw(c188.28,391.72) 120,391.72 120,320 ccw(c155,320) 155,285 222.57,285 cw(c222.57,182.57) v1(295,255) 400.71,149.29 ccw(c471.42,220) 471.42,120 565,120 ; 565,84.2 565,120 ; v1(635,190) 601.42,190 ccw(c601.42,153.58) 565,153.58 565,120
  Bottom Layer w10: U2.9@-109.45,-89.57 -96.17,-89.57 -94,-91.73 C16.1@-94,-133 -94,-138.27 ccw(c-63.27,-138.27) -86.53,-158.35 ccw(c-63.27,-138.27) v1@-85.02,-159.98
5V: C12.2 C14.2 C23.2 C24.2 C31.1 L1.2 R15.2 U1.3 U4.1 U4.3 U7.1 | length 857.7
  Top Layer w10: U4.3@-232.4,-507.81 -232.4,-534.6 ccw(c-219,-534.6) -219,-548 -172,-548 ccw(c-172,-534) -158,-534 -158,-492 -157.6,-492 -157.6,-472 ; C14.2@-160,-455 cw(c-160,-457.4) -157.6,-457.4 -157.6,-472 ; U1.3@-77.89,-523.85 -77.89,-483.11 ccw(c-89,-483.11) C12.2@-89,-472 ; R15.2@22.26,-389.78 22.34,-389.7 22.34,-350.02 v1(22.42,-349.94) -54.41,-349.94 ccw(c-54.41,-384.53) -89,-384.53 C12.2@-89,-472 ; -157.6,-472 C12.2@-89,-472
  Sign w10: v1(22.42,-349.94) 22.49,-350.02 ccw(c105.93,-274.97) 106.08,-387.2 v1(286.52,-387.2)
ADC1_NTC: R23.1 TP1.1 U6.25 | length 264.1
  Top Layer w10: U6.25@569.86,-101.57 618.57,-101.57 cw(c618.57,-128) 645,-128 TP1.1@645,-185 645,-225.2 cw(c596.2,-225.2) R23.1@596.2,-274
  other v1: 632,-198 657,-198 632,-173 657,-173
ADC1_VCC: R20.1 R22.1 U6.11 | length 314.8
  Top Layer w10: R20.1@140.74,-341.3 R22.1@140.74,-296.3 140.74,-180.68 cw(c240.74,-180.68) 170.03,-109.97 190,-90 cw(c209.61,-109.61) 209.61,-81.88 U6.11@235.22,-81.88
AGND: C11.1 C13.1 R3.1 R8.1 R13.2 U3.26 U3.32 | length 701.5
  Top Layer w10: U3.32@-207.93,115.9 -207.93,135.86 cw(c-180.86,135.86) -200,155 -179.12,175.88 C11.1@-179.05,175.88 -179.05,179.95 cw(c-161,179.95) -161,198 -103.47,198 cw(c-103.47,175.88) R13.2@-81.35,175.88 -81.18,175.7 -81.18,119.18 v1(-81,119) ; U3.26@-160.69,9.6 -143,9.6 ccw(c-143,35.18) -124.92,17.08 -94.48,47.52 cw(c-62,15.13) -62,61 -13,61 ; C13.1@-39.8,-25 -21.63,-25 ccw(c-21.63,-16.37) -13,-16.37 -13,61 ; R3.1@-23,176 -24.47,176 -29.47,171 -29.47,120.53 v1(-31,119) cw(c-74.46,75.54) -13,75.54 -13,61
  Sign w10: v1(-81,119) v1(-31,119)
CAN_N: H1.6 H2.6 R5.2 SW1.4 U1.6 | length 2192.2
  Top Layer w10: R5.2@-88.2,-690 ccw(c-88.2,-678.72) -76.92,-678.72 v1(-76.92,-664.67) -77.41,-664.18 -77.41,-634.58 U1.6@-77.89,-634.09
  Sign w10: v1@-130,-345 v1(-130.58,-345) ccw(c-130.58,-343) -128.58,-343 -128.58,70.58 ccw(c-144,70.58) -144,86 -327,86 cw(c-327,151) -392,151 -392,489 cw(c-330,489) -330,551 99,551 cw(c99,522) 128,522 128,482 ccw(c130,482) v1(130,480)
  Bottom Layer w10: v1(-130.58,-345) cw(c-130.58,-347) -128.58,-347 -128.58,-395.47 cw(c-148.11,-395.47) H1.6@-148.11,-415 cw(c-148.11,-434.11) -129,-434.11 -129,-468 cw(c-148.31,-468) -134.66,-481.66 ccw(c-113.24,-505.9) -145.57,-504.91 ccw(c-107.33,-508.37) -134.48,-535.52 -90,-580 cw(c-128.36,-618.36) -74.11,-618.36 -74.11,-656.2 -75.39,-657.48 -75.39,-663.14 v1(-76.92,-664.67) ; v1(130,480) 130,433.11 ccw(c148.11,433.11) H2.6@148.11,415
  other v1: 150,405
CAN_P: H1.5 H2.5 R5.1 R16.1 U1.7 | length 2500.8
  Top Layer w10: R16.1@-258.2,420 cw(c-253.85,420) -256.93,423.07 cw(c-235,423.07) -235,445 -29.14,445 cw(c-29.14,410.86) -5,435 ; U1.7@-52.3,-634.09 -52.61,-634.4 -52.61,-664.36 v1(-52.92,-664.67) -52.92,-677.08 ccw(c-40,-677.08) R5.1@-40,-690 ; -5,435 ccw(c19.14,459.14) 19.14,425 ; 20,425 v1(90,425)
  Sign w10: v1@-110,-341.58 ccw(c-106.58,-341.58) v1(-106.58,-345) cw(c-106.58,-343) -108.58,-343 -108.58,70.58 ccw(c-144,70.58) -144,106 -327,106 cw(c-327,151) -372,151 -372,489 cw(c-330,489) -330,531 99,531 cw(c99,522) 108,522 108,482 cw(c106,482) v1(106,480)
  Bottom Layer w10: v1(-106.58,-345) ccw(c-106.58,-347) -108.58,-347 -108.58,-395.47 ccw(c-89.05,-395.47) H1.5@-89.05,-415 ccw(c-89.05,-434.95) -109,-434.95 -109,-468 cw(c-135.56,-468) -116.77,-486.77 -118.23,-488.23 ccw(c-101.46,-505) -125.18,-505 ccw(c-91.8,-505) -115.41,-528.59 -74.63,-569.37 ; -74.6,-569.4 cw(c-120.26,-615) -55.73,-615 -55.73,-656.2 -54.45,-657.48 -54.45,-663.14 v1(-52.92,-664.67) ; H2.5@89.06,415 ccw(c89.06,431.95) 106,431.95 v1(106,480)
DGND: C12.1 C16.2 C18.2 C19.2 C22.2 C25.2 C27.2 C28.2 C29.1 C30.1 C31.2 C32.1 CN1.2 H2.7 LED1.2 LED2.2 R2.2 R4.1 R17.2 SW1.6 SW1.7 SW1.8 TP2.1 U1.2 U1.8 U1.9 U2.4 U2.11 U2.12 U6.19 U6.23 U6.35 U6.47 U7.3 Y1.2 Y1.4 | length 1076.9
  Top Layer w10: v1(-50,-560) -65.1,-575.1 U1.9@-65.1,-578.97 ; R4.1@-41,-425 C12.1@-41,-472 ; C12.1@-40.8,-472 C12.1@-41,-472 ; U1.9@-32.61,-602.61 -27.61,-602.61 -26.71,-603.5 U1.8@-26.71,-634.09 ; v1(-30,-600) U1.9@-50,-580 ; v1(-30,-580) U1.9@-50,-580 ; U6.47@313.96,174.02 313.96,108.04 ccw(c332,108.04) 332,90 v1(411,90) ; C30.1@500,-273.8 C30.1@500.2,-274 ; C29.1@502,-479 540.71,-440.29 ccw(c470,-369.58) 570,-369.58 TP2.1@570,-365 ; U6.35@569.86,95.28 599.46,95.28 ccw(c599.46,145.54) C27.2@635,110 ; U1.9@-65.1,-578.97 -51.03,-578.97 U1.9@-50,-580 ; U1.9@-65.1,-578.97 -52.3,-566.18 -52.3,-483.5 cw(c-40.8,-483.5) C12.1@-41,-472
  Bottom Layer w10: U2.12@-109.45,-12.8 U2.11@-109.45,-38.39 -66.61,-38.39 cw(c-66.61,-59.2) -45.8,-59.2 -45.8,-115 ; C16.2@-45.8,-133 -45.8,-115 ; v1(15,-115) v1(-5,-115) -45.8,-115 ; v1(55,-115) 55,-32.16 60,-27.16 v1(60,-5) 62.16,-5 77.79,10.63 107.28,10.63 U2.4@109.45,12.8
  other v1: 261,-645 286,-635 311,-625 336,-615 -105,-600 355,-600 376,-585 291,-570 -30,-560 316,-560 341,-550 291,-545 366,-540 316,-535 341,-525 386,-525 291,-520 366,-515 316,-510 406,-510 341,-500 386,-500 366,-490 365,-425 365,-395 557,-378 582,-378 365,-365 557,-353 582,-353 500,-250 241,-125 35,-115 75,-115 95,-115 115,-115 135,-115 60,-25 25,65 50,65 431,70 50,90 431,90 391,110 411,110 0,120 665,120 665,150 595,165 665,180 550,240 575,240 600,240 550,265 575,265 600,265 550,290 575,290 600,290 550,315 575,315 600,315 80,320 5,325 550,340 575,340 600,340 -20,350 5,350 30,350 550,365 575,365 525,390 550,390 575,390 525,415 550,415 500,440 525,440 475,465 500,465 450,490 475,490 425,515 450,515 425,540 310,625 285,635 260,645 235,655 210,660 185,665
DRV8323_CAL: R13.1 U3.31 U6.16 | length 813.7
  Top Layer w8: U6.16@353.33,-160.62 v1@353.33,-96.33
  Top Layer w10: U3.31@-188.25,115.9 -188.25,134.57 cw(c-180.57,134.57) v1(-186,140) ; v1(-186,140) -179.66,146.34 cw(c-166,132.69) -166,152 ccw(c-166,182.35) -144.54,160.89 R13.1@-129.55,175.88
  Sign w10: v1@-186,140 cw(c-135.3,89.3) -135.3,161 15.12,161 15.18,161 cw(c15.46,-115.53) 211.07,79.93 ; 211.09,79.91 328.96,-37.96 cw(c270.92,-96) v1(353,-96)
DRV8323_EN: U3.30 U6.17 | length 758.9
  Top Layer w10: U3.30@-160.69,88.34 -160.69,116.27 cw(c-141.27,116.27) -160.34,119.91 cw(c-141.27,116.27) -159.26,123.57 cw(c-141.27,116.27) v1(-155,130) ; U6.17@373.01,-160.62 v1(373,-117)
  Sign w10: v1(-155,130) cw(c-121.2,96.2) -145.43,137.4 cw(c-121.2,96.2) -121.2,144 15.07,144 cw(c15.23,-12.38) 126.08,97.92 289.13,-65.13 cw(c243.57,-110.69) 308,-110.69 ccw(c336.31,-110.69) 336.31,-139 351,-139 ccw(c351,-117) v1(373,-117)
DRV8323_HA: U3.34 U6.30 | length 925.8
  Top Layer w8: v1@314,7 ccw(c338.47,31.47) 338.47,-3.14 U6.30@569.86,-3.14
  Top Layer w10: U3.34@-247.3,115.9 -247.3,146 v1(-247,146)
  Sign w10: v1@-247,146 cw(c-215,146) -215,178 14.89,178 cw(c15.06,-130.88) 233.57,87.43 233.63,87.37 v1(314,7)
DRV8323_HB: U3.36 U6.31 | length 1000.1
  Top Layer w10: v1(-287,145) -286.67,145 U3.36@-286.67,115.9 ; v1@343,37 ccw(c392.4,86.4) 392.4,16.54 U6.31@569.86,16.54
  Sign w10: v1(-287,145) -287,176 cw(c-251,176) -251,212 16.11,212 cw(c16.46,-153.85) 275.39,104.61 275.46,104.54 v1(343,37)
DRV8323_HC: U3.38 U6.32 | length 1063.2
  Top Layer w10: U3.38@-326.02,115.92 v1(-326,146) ; v1(374,66) 374.48,65.52 ccw(c445.19,136.23) 445.19,36.23 U6.32@569.86,36.23
  Sign w10: v1(-326,146) -327,147 -327,177.5 cw(c-257.5,177.5) -257.5,247 15.89,247 cw(c16.28,-179.64) 318.29,121.71 ; 318.31,121.69 v1(374,66)
DRV8323_LA: U3.35 U6.27 | length 990.4
  Top Layer w8: U3.35@-266.99,115.9 v1(-267,164)
  Top Layer w10: v1(373,-23) 382.91,-32.91 ccw(c453.62,37.8) 453.62,-62.2 U6.27@569.86,-62.2
  Sign w10: v1(-267,164) cw(c-236,164) -236,195 15.55,195 cw(c15.8,-141.05) 253.62,96.38 ; 253.64,96.36 v1(373,-23)
DRV8323_LB: U3.37 U6.28 | length 1062.6
  Top Layer w8: v1(-307,164) -306.36,164 U3.37@-306.36,115.9 ; v1(435,-23) ccw(c482.09,24.09) 482.09,-42.51 U6.28@569.86,-42.51
  Sign w10: v1@-308.16,164 v1(-307,164) -307,176 cw(c-253,176) -253,230 16.01,230 cw(c16.38,-165.01) 295.84,114.16 ; 295.87,114.13 433,-23 v1(435,-23)
DRV8323_LC: U3.39 U6.29 | length 1129.1
  Top Layer w8: v1(-347,163) -345.73,161.73 U3.39@-345.73,115.9
  Top Layer w10: v1(492,-23) 569.86,-23 U6.29@569.86,-22.83
  Sign w10: v1(-347,163) -347,178 cw(c-260,178) -260,265 15.8,265 cw(c16.06,-188.73) 337,132 ; 337.03,131.97 v1(492,-23)
DRV8323_nF: R6.2 U3.25 U6.18 | length 783.6
  Top Layer w8: U6.18@392.7,-160.62 392.7,-96.3 v1(393,-96)
  Top Layer w10: U3.25@-160.69,-10.08 -131.63,-10.08 ; -131.59,-10.08 ccw(c-131.59,34.59) -99.99,3.01 -93,10 R6.2@-88,15 -85.5,15 -62.03,38.47 -56.53,38.47 v1(-55,40)
  Sign w10: v1(-55,40) 106.75,40 ; 106.75,40 cw(c106.75,-66.83) 182.29,8.71 235.93,-44.93 cw(c166.53,-114.34) 264.68,-114.14 cw(c166.53,-114.34) 264.68,-114.34 ccw(c306.34,-114.34) 306.34,-156 355,-156 ccw(c355,-118) 393,-118 v1(393,-96)
DRV8323_SOA: U3.23 U6.8 | length 403
  Top Layer w10: U3.23@-160.69,-49.45 137.18,-49.45 ccw(c137.18,-5.11) 168.5,-36.5 168.54,-36.46 cw(c201.45,-69.38) 201.45,-22.83 U6.8@235.22,-22.83
DRV8323_SOB: U3.22 U6.9 | length 403
  Top Layer w10: U3.22@-160.69,-69.14 140.86,-69.14 ccw(c140.86,-20.86) 175,-55 cw(c205.16,-85.16) 205.16,-42.51 U6.9@235.22,-42.51
DRV8323_SOC: U3.21 U6.10 | length 403
  Top Layer w10: U3.21@-160.69,-88.82 146.63,-88.82 ccw(c146.63,-41.63) 180,-75 cw(c210.9,-105.9) 210.9,-62.2 U6.10@235.22,-62.2
DVDD: C11.2 C13.2 C29.2 L2.1 R6.1 R10.1 U3.24 U3.27 U3.33 | length 1885.7
  Top Layer w8: U3.33@-227.62,115.9 C11.2@-227.62,175.88
  Top Layer w10: C11.2@-227.62,175.88 C11.2@-227.25,175.88 cw(c-188.12,175.88) -188.12,215 -90,215 cw(c-90,178) -53,178 -53,94.83 cw(c-59.83,94.83) v1@-54.99,90.01 ; U3.24@-160.69,-29.77 -92.77,-29.77 ccw(c-92.77,-25) C13.2@-88,-25 ; U3.27@-160.69,29.29 -153.79,29.29 ccw(c-153.79,48.79) -140,35 -93.6,81.4 cw(c-76.53,64.33) -89,85 cw(c-76.53,64.33) -78.4,88.4 cw(c-76.53,64.33) -76.53,88.47 -56.53,88.47 v1(-55,90) ; C13.2@-83,-20 -78.57,-20 v1(-62.78,-4.22) -48.57,10 -44.8,10 R6.1@-39.8,15
  Sign w10: -90,-445 -110.86,-465.86 ccw(c-76.72,-500) -125,-500 ccw(c-95,-500) -95,-530 188.58,-530 ccw(c188.58,-430) 259.29,-500.71 270.71,-489.29 cw(c341.42,-560) 341.42,-460 v1(455,-460) ; -90,-445 ccw(c-155.7,-379.3) -62.78,-379.3 v1(-62.78,-4.22) cw(c-62.78,18) -85,18 -85,60 cw(c-55,60) -82.07,72.93 cw(c-55,60) -57.25,89.92 cw(c-55,60) v1(-55,90)
ENCODER_CLK: U2.7 U6.13 | length 239.3
  Top Layer w10: v1(285,-117) cw(c262.63,-139.37) 286.53,-118.64 cw(c262.63,-139.37) 294.09,-136.06 cw(c262.63,-139.37) 294.27,-139.37 U6.13@294.27,-160.62
  Bottom Layer w10: U2.7@109.45,-63.98 190.55,-63.98 cw(c190.55,-163.98) 261.27,-93.27 v1(285,-117)
ENCODER_CS: U2.8 U6.12 | length 138.2
  Top Layer w10: v1(207,-106) 207,-105.75 211.18,-101.57 U6.12@235.22,-101.57
  Bottom Layer w10: U2.8@109.45,-89.57 189.49,-89.57 190.57,-89.57 cw(c190.57,-106) v1(207,-106) v1@205.93,-106
ENCODER_MISO: U2.5 U6.14 | length 318.1
  Top Layer w10: U6.14@313.98,-160.59 v1(314,-64)
  Bottom Layer w10: U2.5@109.45,-12.8 221.37,-12.8 cw(c221.37,-112.8) 292.08,-42.08 v1(314,-64)
ENCODER_MOSI: U2.6 U6.15 | length 296.6
  Top Layer w10: U6.15@333.64,-160.62 333.76,-160.5 333.76,-117.24 v1(334,-117)
  Bottom Layer w10: U2.6@109.45,-38.39 213.96,-38.39 cw(c213.96,-138.39) 284.68,-67.68 v1(334,-117)
FDCAN_RX: U1.4 U6.33 | length 1040.3
  Top Layer w10: U1.4@-103.48,-523.86 -102.58,-522.95 -102.58,-503.74 -101,-502.16 v1(-101,-500) ; v1(519,57) 520.09,55.91 U6.33@569.86,55.91
  Sign w10: v1(-101,-500) ccw(c-101,-497.59) -99.29,-499.29 -60.64,-460.64 ccw(c-98.28,-422.93) -45,-422.87 -45,-349 cw(c-1,-349) -1,-305 204.58,-305 ccw(c204.64,-159.29) 307.71,-262.29 489.71,-80.29 ccw(c419,-9.58) 490,-80 ccw(c419,-9.58) 519,-9.58 v1(519,57)